# Altium PCB PCB-watch-V2.1.PcbDoc
Units mm, origin at the board's own origin, x right, y up, seen from the top; angles counter-clockwise.
Board outline 26 x 32 mm, 4 copper layers (Top Layer, GND, POWER, Bottom Layer), stack 0.603 mm thick; 97 components, 96 nets, 406 pads, 184 vias.
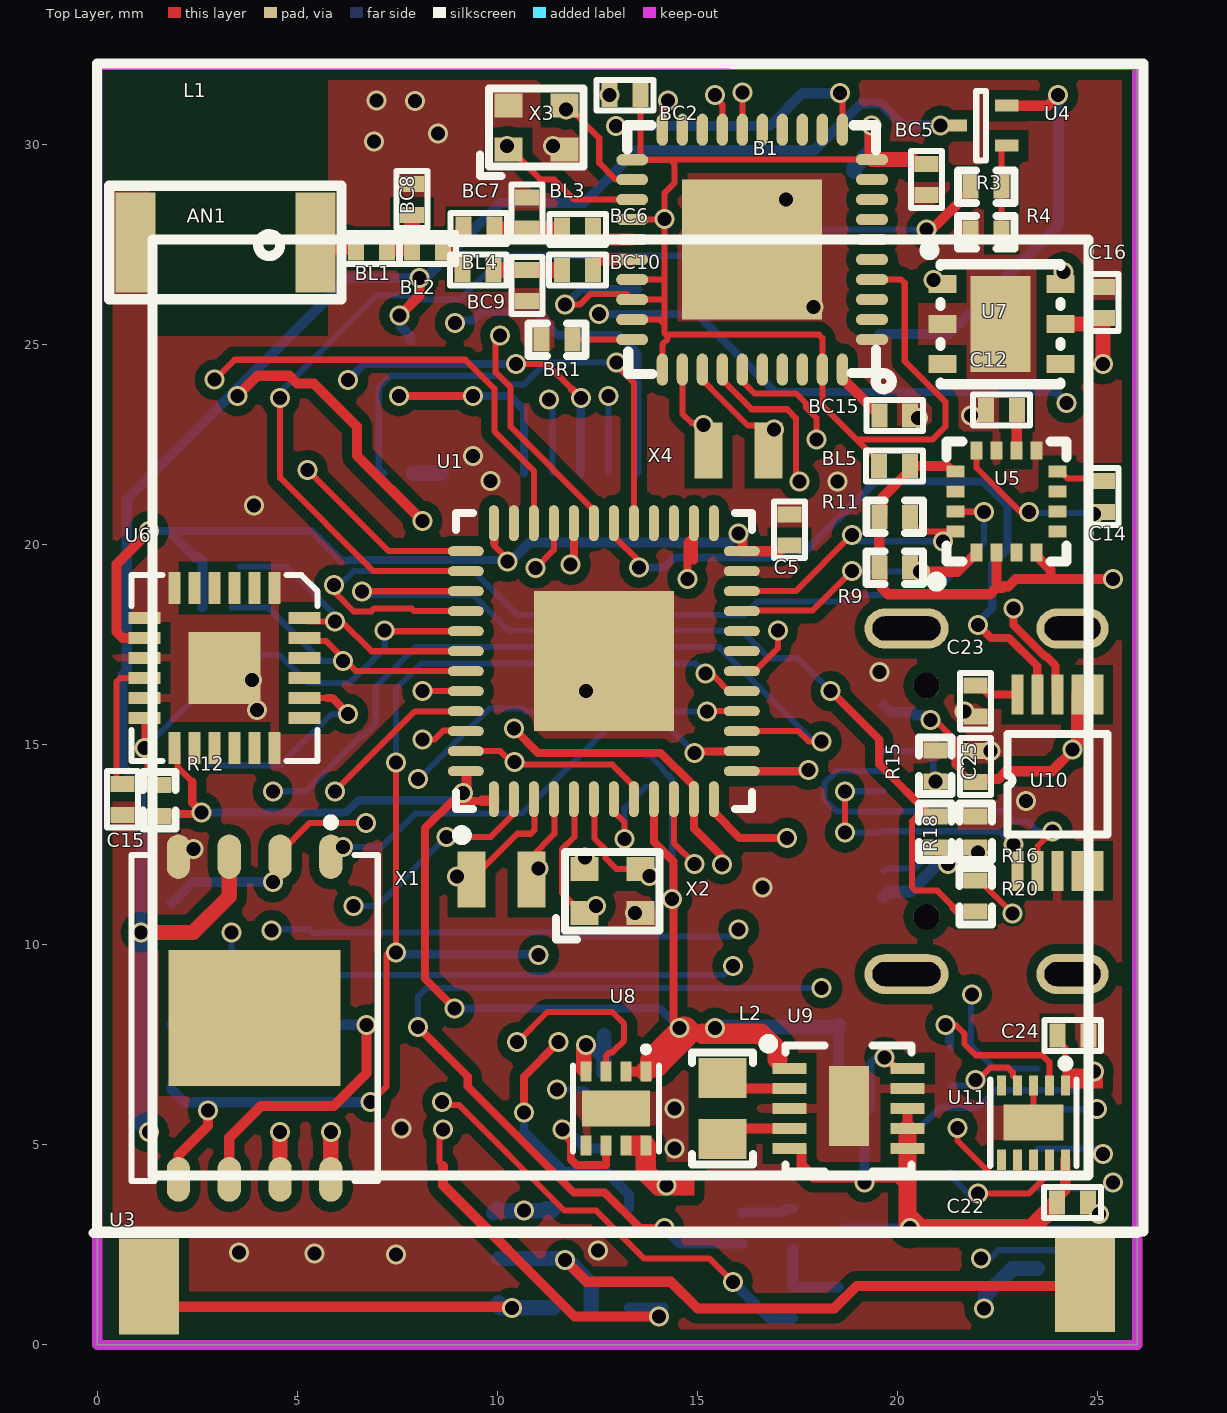
[diagram p0: Top Layer view]
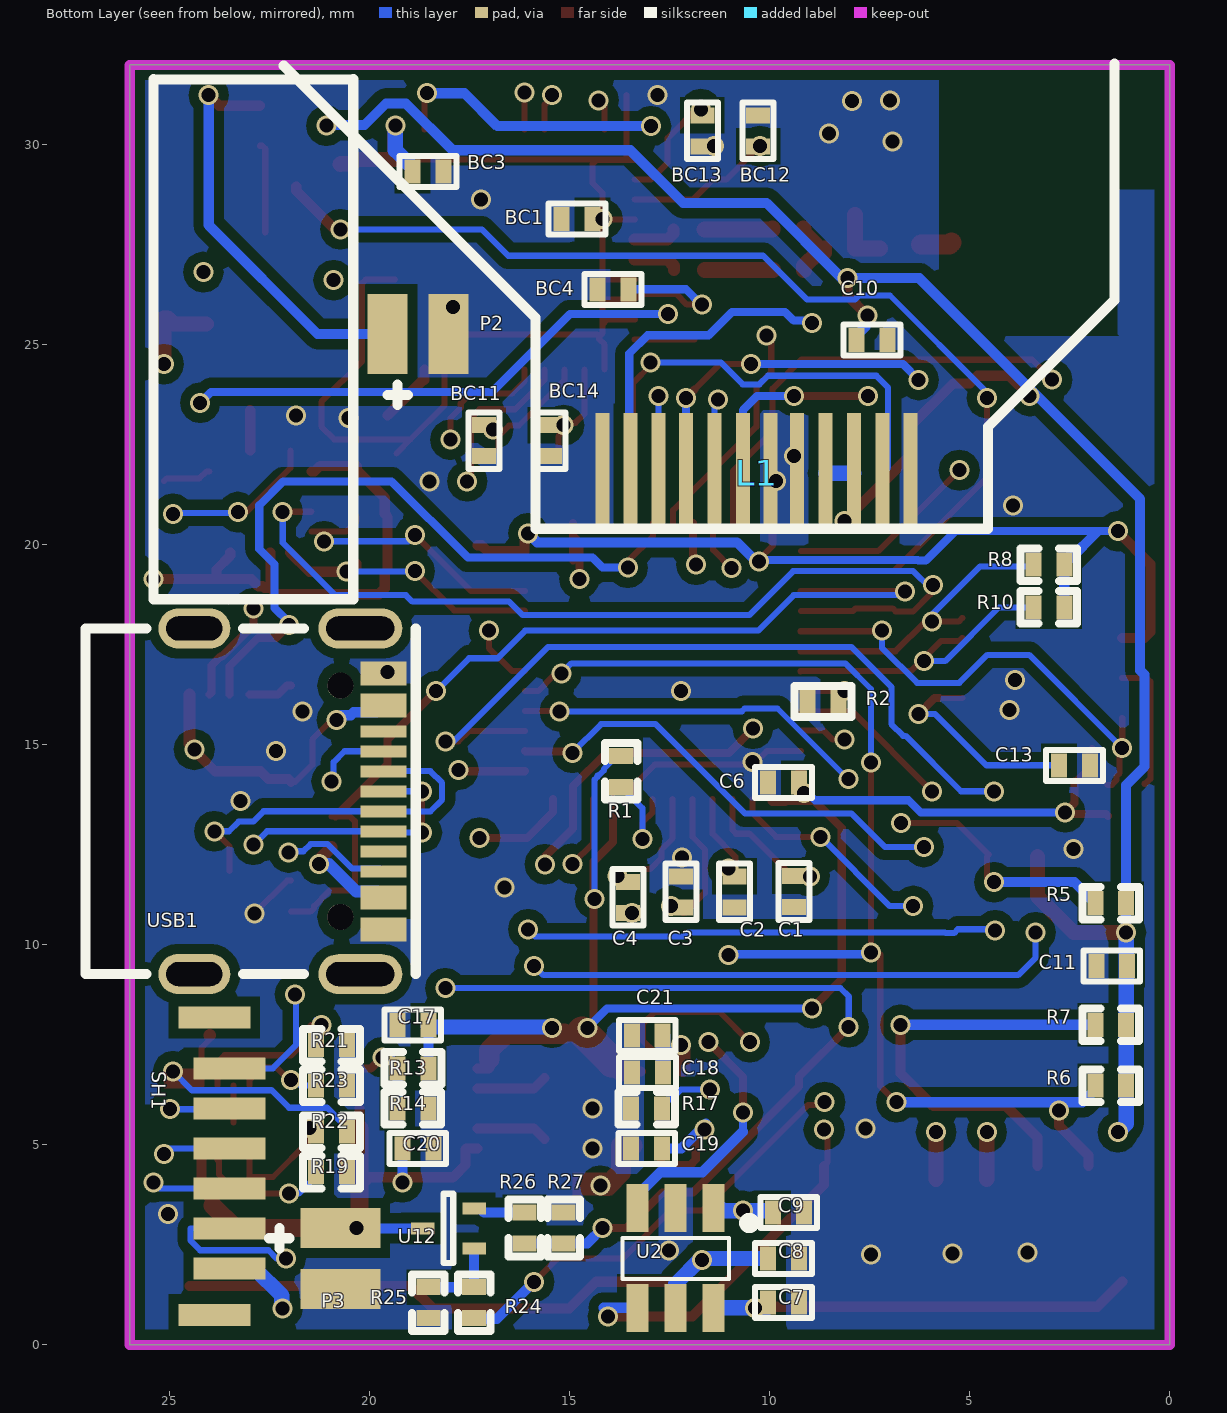
[diagram p1: Bottom Layer view, seen from below]
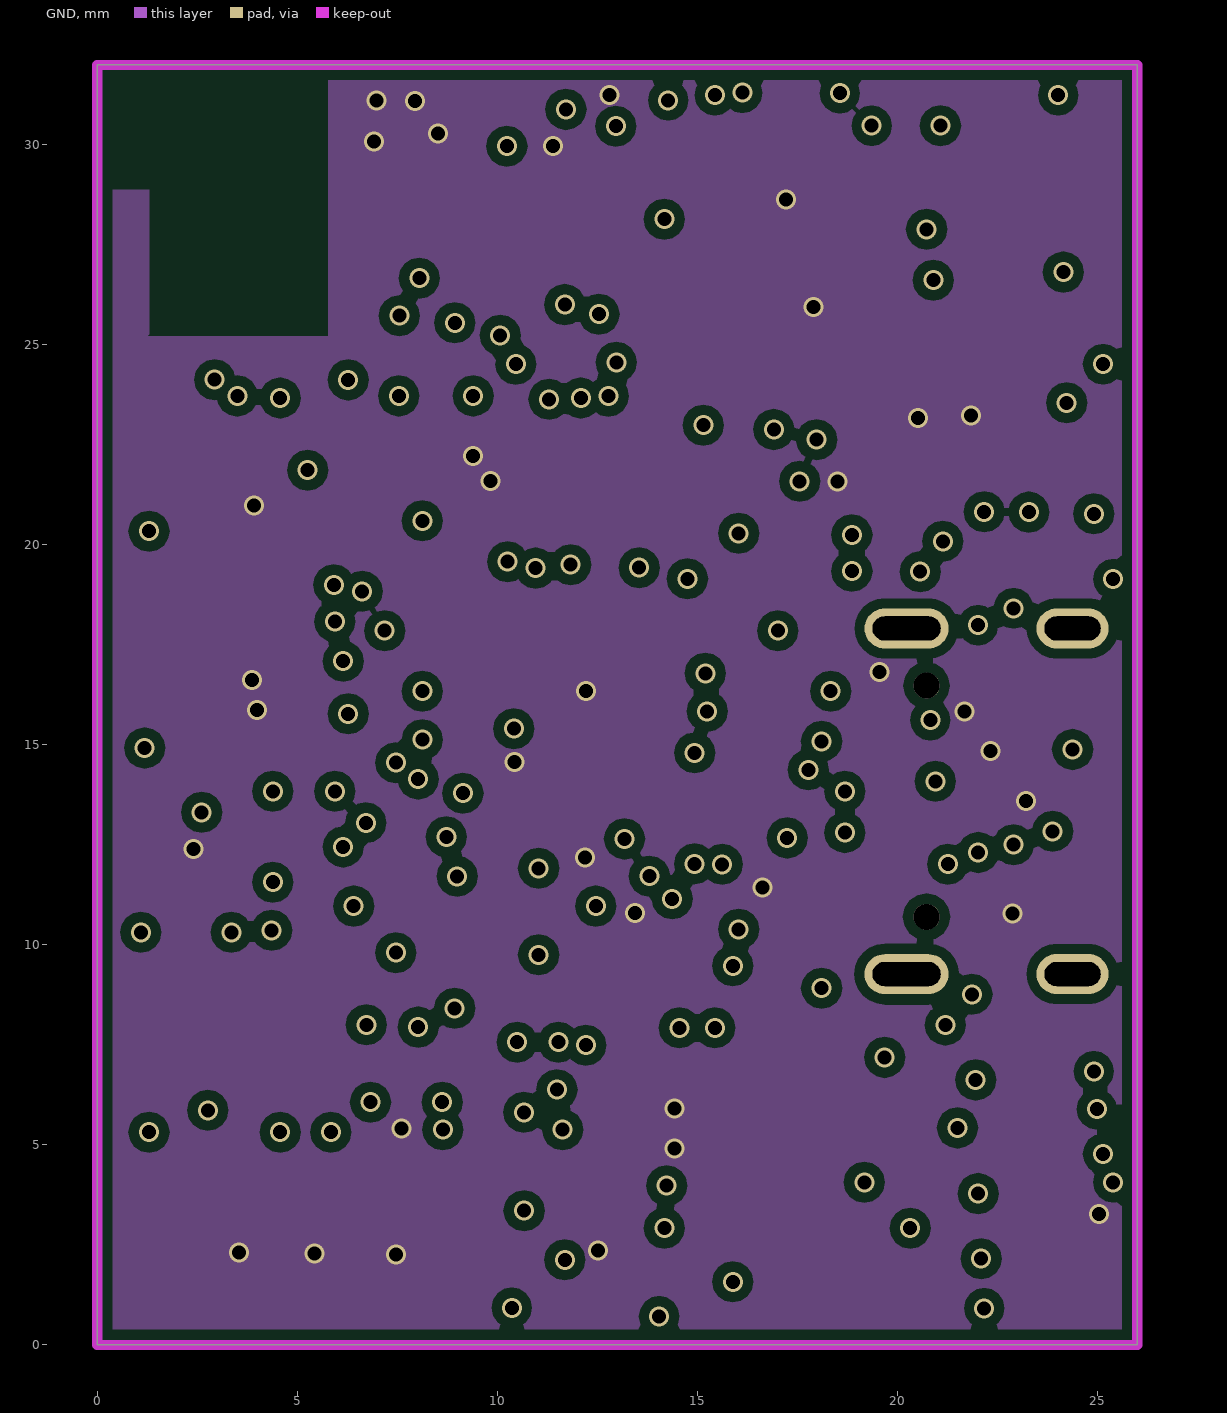
[diagram p2: GND]
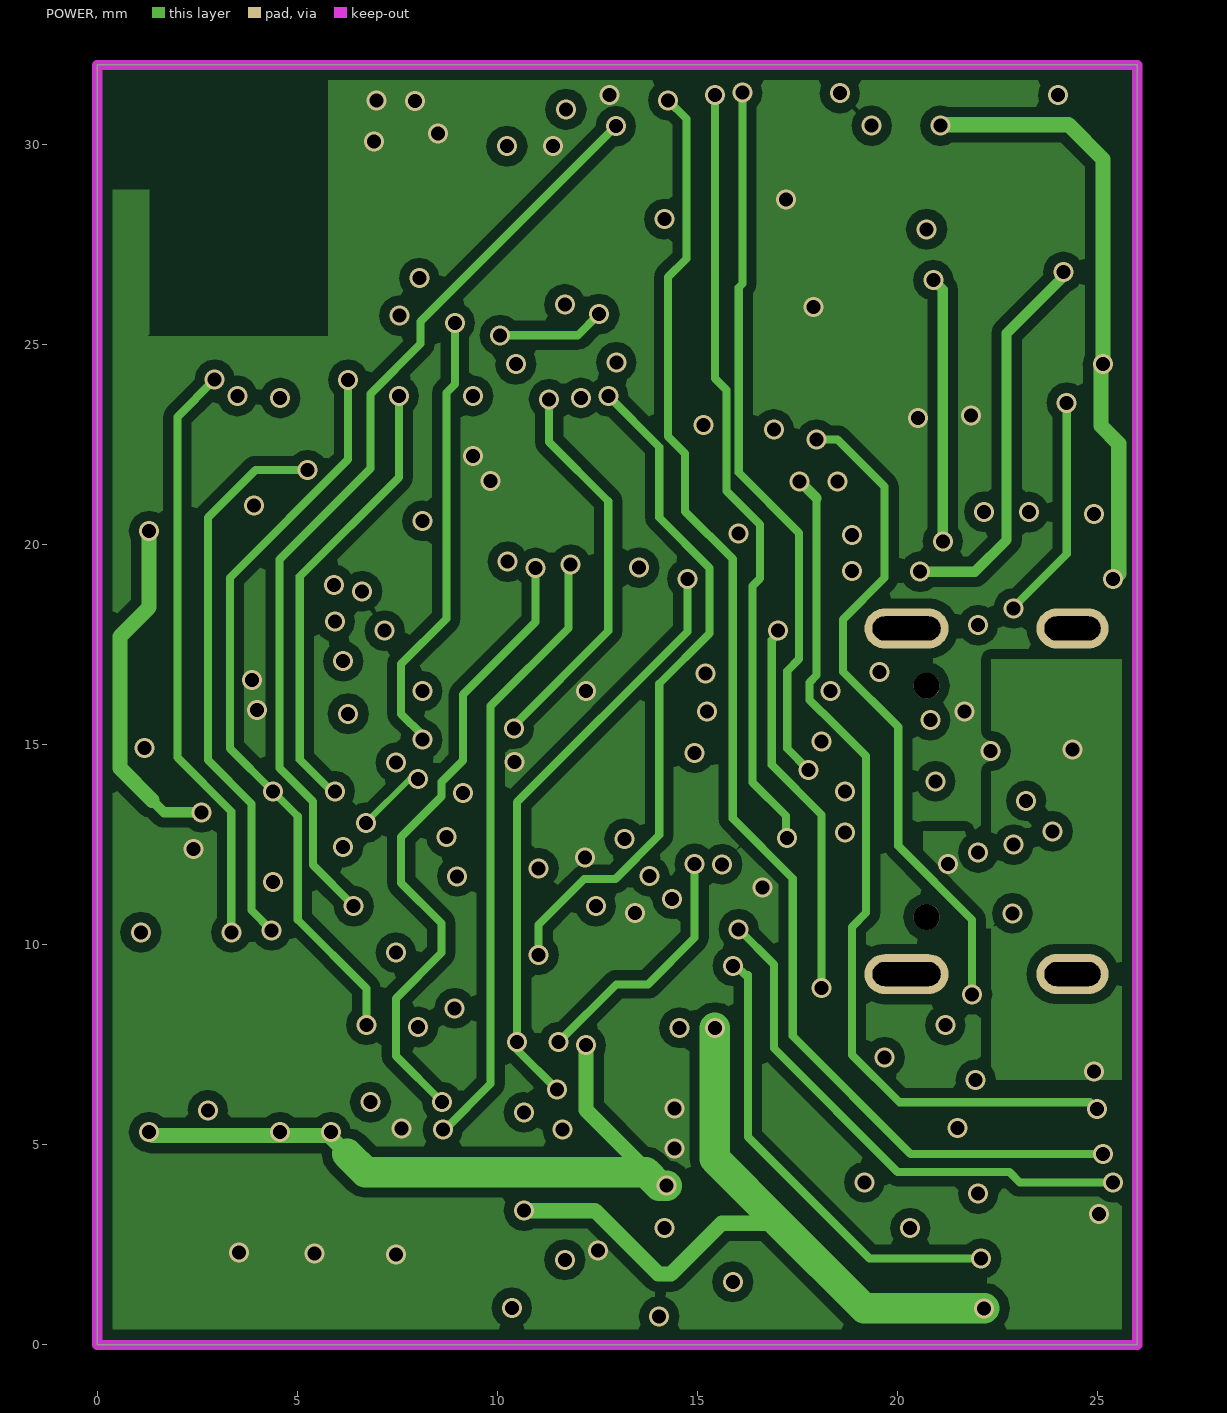
[diagram p3: POWER]
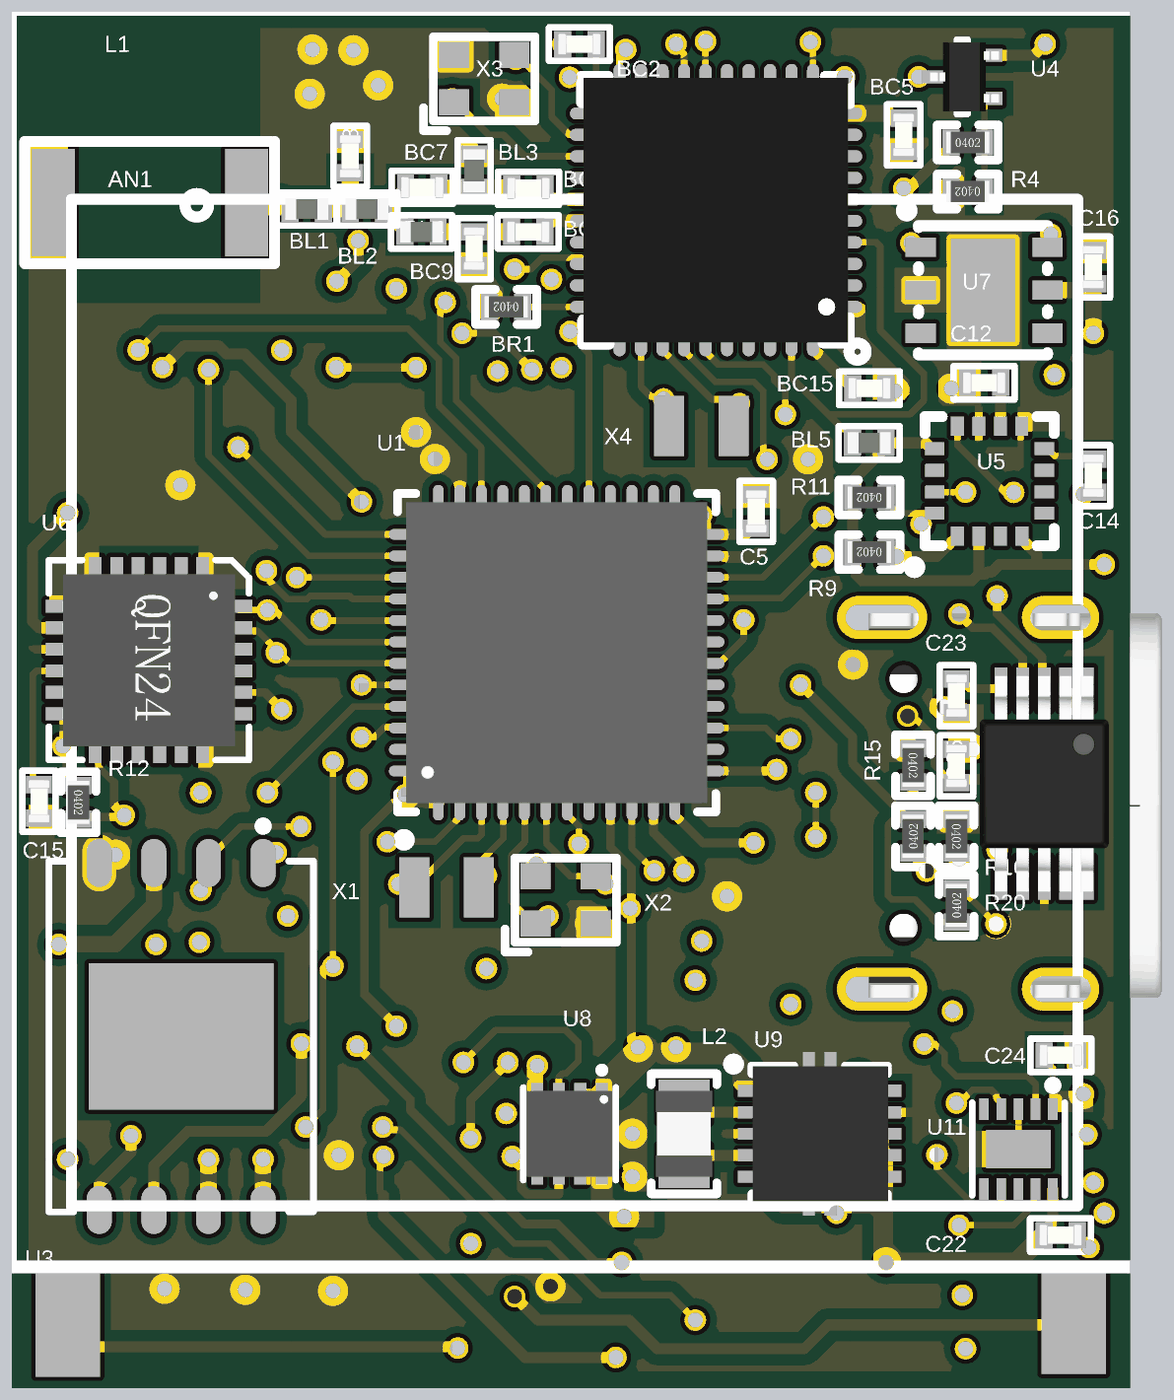
[diagram p4: 3D render of the assembled board from above, using the file's embedded part models]
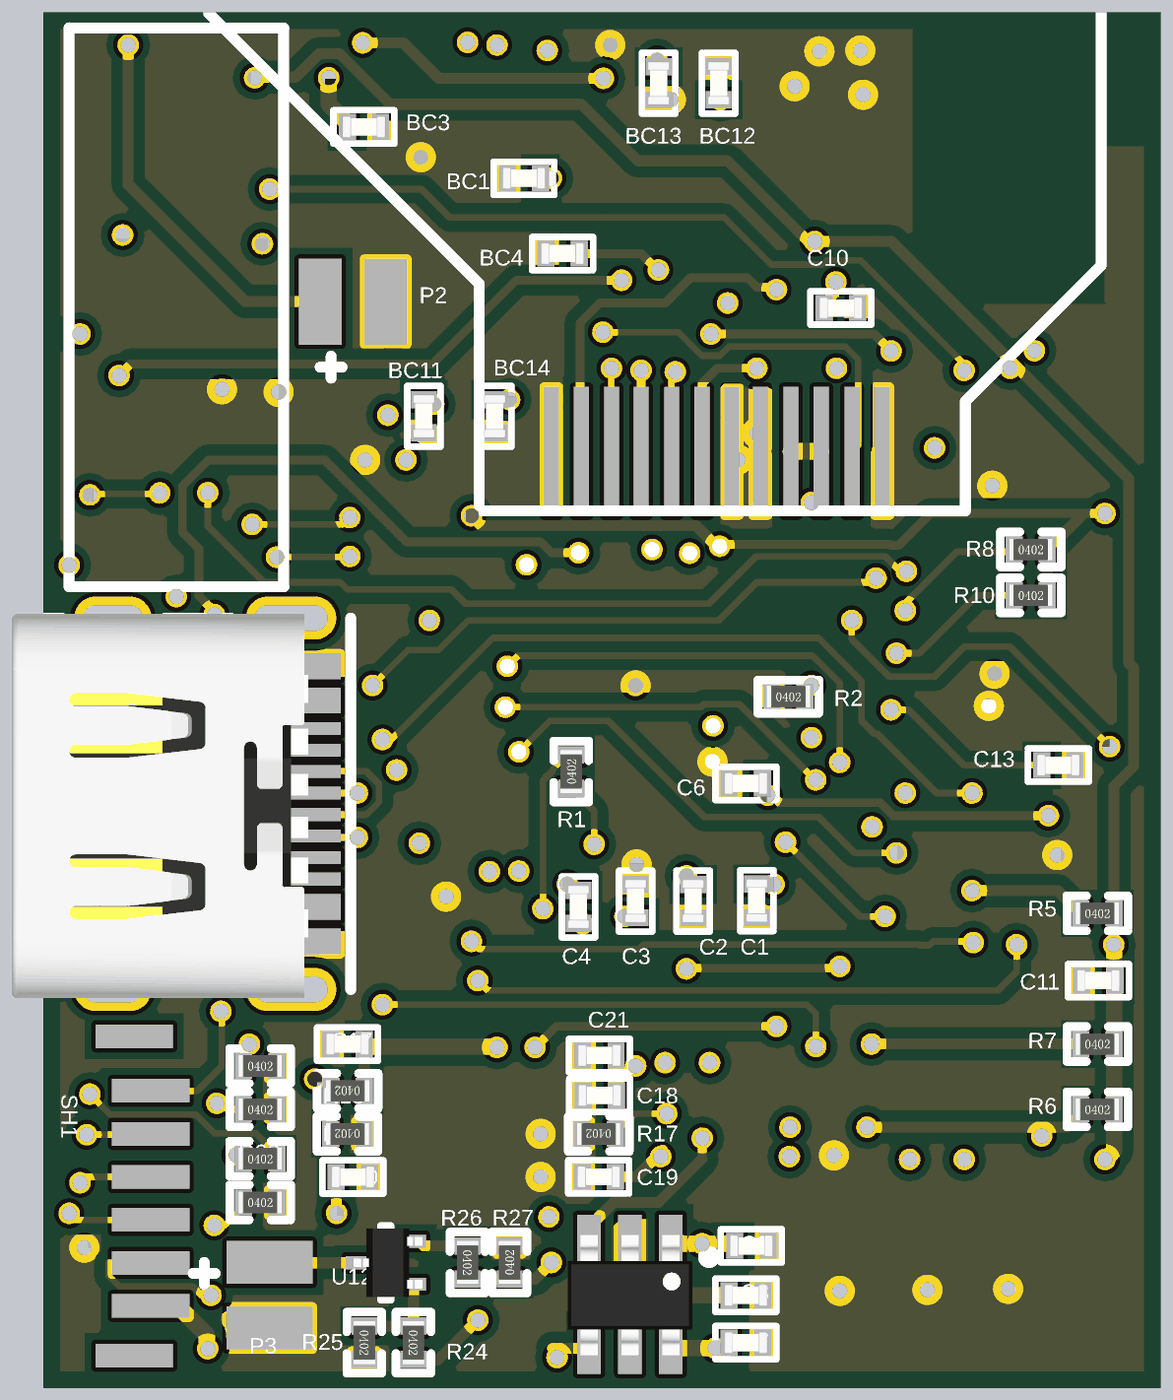
[diagram p5: 3D render of the assembled board from below, using the file's embedded part models]

## Layer stack, top to bottom
Top Solder: solder mask 0.0102, Solder Resist, Dk 3.5
Top Layer: signal copper 0.0356
Dielectric 2: prepreg 0.0711, PP-006, Dk 4.1
GND: signal copper 0.035
Dielectric 1: dielectric 0.32, FR-4, Dk 4.8
POWER: signal copper 0.035
Dielectric 3: prepreg 0.0711, PP-006, Dk 4.1
Bottom Layer: signal copper 0.0356
Bottom Solder: solder mask 0.0102, Solder Resist, Dk 3.5

## Board outline
0,0 0,32 26,32 26,0

## Design rules (kind name [scope] priority, off if disabled: settings)
Clearance [All] p1: gap=0.254 ignorepadtopadclearanceinfootprint=TRUE except(0.102: Arc-Arc Arc-Track Arc-SMDPad Arc-THPad Arc-Via Track-Track Track-SMDPad Track-THPad Track-Via SMDPad-SMDPad SMDPad-THPad SMDPad-Via THPad-THPad THPad-Via Via-Via)
DiffPairsRouting [All] p1: maxlimit=0.254 minlimit=0.15 mostfreqgap=0.254 toplayer_minwidth=0.381 toplayer_maxwidth=0.381 toplayer_prefwidth=0.381 midlayer1_minwidth=0.381 midlayer1_maxwidth=0.381 midlayer1_prefwidth=0.381 midlayer2_minwidth=0.381 midlayer2_maxwidth=0.381 midlayer2_prefwidth=0.381 bottomlayer_minwidth=0.381 bottomlayer_maxwidth=0.381 bottomlayer_prefwidth=0.381 maxuncoupledlength=12.7
HoleToHoleClearance [All] p1: gap=0.15 allowstackedmicrovias=TRUE
MinimumSolderMaskSliver [All] p1: minsoldermaskwidth=0.01
PlaneConnect [All] p1: planeconnectstyle=Relief reliefexpansion=0.508 reliefentries=4 reliefconductorwidth=0.5 reliefairgap=0.254
PolygonConnect [All] p1: connectstyle=Direct reliefconductorwidth=0.4 reliefentries=4 polygonreliefangle="90 Angle" airgapwidth=0.15
RoutingVias [All] p1: holewidth=3 width=3 viastyle="Through Hole" minholewidth=0.25 minwidth=0.35 maxholewidth=3 maxwidth=3
SilkToSilkClearance [All] p1: silktosilkclearance=0
SilkToSolderMaskClearance [IsPad] p1: minsilkscreentomaskgap=0 clearancetoexposedcopper=TRUE
SolderMaskExpansion [All] p1: expansion=0.102
Width [All] p1: maxlimit=1 minlimit=0.076 preferedwidth=0.152
24 further rules are at their usual default settings.

## Classes and differential pairs
component class 04-POWERV2.1: C17 C18 C19 C20 C21 C22 C23 C24 C25 L2 P3 R13 R14 R15 R16 R17 R18 R19 R20 R21 R22 R23 R24 R25 R26 R27 U8 U9 U10 U11 U12 USB1
component class 03-PeripheralPart-V2.1: C7 C8 C9 C10 C11 C12 C13 C14 C15 C16 L1 P2 R3 R4 R5 R6 R7 R8 R9 R10 R11 R12 U2 U3 U4 U5 U6 U7
component class 02-bluetooth-V2.1: AN1 B1 BC1 BC2 BC3 BC4 BC5 BC6 BC7 BC8 BC9 BC10 BC11 BC12 BC13 BC14 BC15 BL1 BL2 BL3 BL4 BL5 BR1 X3 X4
component class 01-MCU-V2.1: C1 C2 C3 C4 C5 C6 R1 R2 SH1 U1 X1 X2

## Components (designator, comment, footprint, x,y, rotation, side; value= is the part's Value field where it differs from the comment)
AN1 "AN9520-245" AN-5120 5.461,27.559 r180 top
B1 "CC2541" QFN40-CC254X 16.373,27.382 r90 top
BC1 "100nF" CC1005-0402 14.816,28.143 r0 bottom
BC2 "100nF" CC1005-0402 13.196,31.242 r180 top
BC3 "220PF" CC1005-0402 18.542,29.337 r180 bottom
BC4 "100nF" CC1005-0402 13.919,26.391 r0 bottom
BC5 "100nF" CC1005-0402 20.734,29.132 r270 top
BC6 "18PF" CC1005-0402 12.012,27.89 r0 top
BC7 "1PF" CC1005-0402 9.542,27.911 r0 top
BC8 "1PF" CC1005-0402 7.868,28.632 r90 top
BC9 "1PF" CC1005-0402 10.748,26.487 r270 top
BC10 "18PF" CC1005-0402 12.006,26.874 r0 top
BC11 "15PF" CC1005-0402 17.145,22.606 r90 bottom
BC12 "27PF" CC1005-0402 10.287,30.353 r270 bottom
BC13 "27PF" CC1005-0402 11.684,30.353 r270 bottom
BC14 "15PF" CC1005-0402 15.494,22.606 r90 bottom
BC15 "100nF" CC1005-0402 19.939,23.241 r180 top
BL1 "1nH" Inductor-0402 6.858,27.409 r0 top
BL2 "1nH" Inductor-0402 8.255,27.409 r0 top
BL3 "2nH" Inductor-0402 10.748,28.298 r270 top
BL4 "2nH" Inductor-0402 9.525,26.874 r0 top
BL5 "2nH" Inductor-0402 19.933,21.971 r0 top
BR1 "56KR" CR1005-0402 11.493,25.132 r180 top
C1 "15pF" CC1005-0402 9.397,11.339 r90 bottom
C2 "15pF" CC1005-0402 10.88,11.328 r90 bottom
C3 "22pF" CC1005-0402 12.217,11.328 r90 bottom
C4 "22pF" CC1005-0402 13.547,11.191 r90 bottom
C5 "100nF" CC1005-0402 17.307,20.378 r270 top
C6 "100nF" CC1005-0402 9.652,14.065 r180 bottom
C7 "1pF" CC1005-0402 9.652,1.056 r180 bottom
C8 "1pF" CC1005-0402 9.652,2.159 r180 bottom
C9 "100NF" CC1005-0402 9.525,3.308 r0 bottom
C10 "100nF" CC1005-0402 7.442,25.124 r180 bottom
C11 "100nF" CC1005-0402 1.448,9.479 r0 bottom
C12 "4.7uF" CC1005-0402 22.606,23.368 r180 top
C13 "2.2uF" CC1005-0402 2.382,14.491 r180 bottom
C14 "0.22uF" CC1005-0402 25.146,21.209 r270 top
C15 "100NF" CC1005-0402 0.631,13.641 r90 top
C16 "100nF" CC1005-0402 25.146,26.057 r90 top
C17 "10uF" CC1005-0402 18.923,8.001 r180 bottom
C18 "100nF" CC1005-0402 13.054,6.808 r0 bottom
C19 "100nF" CC1005-0402 13.076,4.913 r180 bottom
C20 "10uF" CC1005-0402 18.796,4.91 r0 bottom
C21 "10uF" CC1005-0402 13.061,7.735 r180 bottom
C22 "1uF" CC1005-0402 24.384,3.556 r180 top
C23 "10nF" CC1005-0402 21.964,16.094 r270 top
C24 "1uF" CC1005-0402 24.39,7.735 r0 top
C25 "10nF" CC1005-0402 21.964,14.461 r270 top
L1 "TFT LED" LCD-1.3-(2) 6.479,21.793 r180 top locked
L2 "3.3uH" Inductor-0805 15.629,5.91 r90 top
P2 "power" POWER-3.7V 19.939,24.003 r180 bottom
P3 "power" POWER-3.7V 22.004,3.302 r270 bottom
R1 "10KR" CR1005-0402 13.716,14.341 r90 bottom
R2 "10KR" CR1005-0402 8.664,16.084 r180 bottom
R3 "1K" CR1005-0402 22.225,28.956 r0 top
R4 "10K" CR1005-0402 22.225,27.813 r180 top
R5 "47K" CR1005-0402 1.473,11.043 r180 bottom
R6 "47K" CR1005-0402 1.473,6.483 r180 bottom
R7 "47K" CR1005-0402 1.473,8.003 r180 bottom
R8 "10K" CR1005-0402 3.023,19.507 r180 bottom
R9 "10K" CR1005-0402 19.939,19.431 r180 top
R10 "10K" CR1005-0402 3.023,18.44 r180 bottom
R11 "10K" CR1005-0402 19.939,20.701 r180 top
R12 "10K" CR1005-0402 1.549,13.614 r270 top
R13 "1M" CR1005-0402 18.919,6.913 r0 bottom
R14 "178K" CR1005-0402 18.923,5.913 r0 bottom
R15 "1.5K" CR1005-0402 20.955,14.478 r270 top
R16 "1.5K" CR1005-0402 21.964,12.827 r270 top
R17 "10K" CR1005-0402 13.076,5.913 r0 bottom
R18 "10K" CR1005-0402 20.955,12.827 r90 top
R19 "10K" CR1005-0402 20.955,4.318 r180 bottom
R20 "10K" CR1005-0402 21.964,11.219 r90 top
R21 "1K" CR1005-0402 20.955,7.493 r180 bottom
R22 "1K" CR1005-0402 20.955,5.334 r180 bottom
R23 "2K" CR1005-0402 20.955,6.483 r180 bottom
R24 "1K" CR1005-0402 17.389,1.056 r270 bottom
R25 "10K" CR1005-0402 18.532,1.056 r270 bottom
R26 "10K" CR1005-0402 16.129,2.921 r270 bottom
R27 "10K" CR1005-0402 15.152,2.921 r90 bottom
SH1 "SH1.0-7P" SH1.0-6P 23.503,6.913 r270 bottom
U1 "STM32L431CCU6" STM32-UFQFPN48_N 12.667,17.094 r90 top
U2 "BS812A-1" SOT23-6 12.288,2.159 r0 bottom
U3 "W25Q256JVEIQ" WSON-8_L8.0-W6.10-P1.27-TL-EP 3.937,8.172 r270 top
U4 "MMBT3904TT1G" SOT-416 22.098,30.48 r0 top
U5 "HMC5883L" LPCC-16_L3.0-W3.0-P0.50-BL 22.733,21.082 r0 top
U6 "MPU6050" "QFN24 - duplicate" 3.187,16.923 r270 top
U7 "SI7020" DFN-6 22.606,25.521 r270 top
U8 "TPS22965" UDFN-8 12.968,5.91 r270 top
U9 "TPS63000" SON10 17.313,6.872 r0 top
U10 "CH340E" MSOP-10 23.003,11.853 r90 top
U11 "BQ24040" WSON-10_L2.0-W2.0-P0.40-BL-EP 23.403,5.555 r270 top
U12 "MMBT3904TT1G" SOT-416 18.032,2.913 r180 bottom
USB1 "Tpye-c 16P" "TYPE-C 16P" 20.734,10.701 r270 bottom
X1 "32.768Khz" XTAL-2012 10.86,11.638 r180 top
X2 "32Mhz" XTAL-2016 12.177,10.796 r0 top
X3 "32Mhz" XTAL-2016 10.284,29.888 r0 top
X4 "32.768Khz" XTAL-2012 15.284,22.362 r0 top

## Footprints (in the part's own frame and the unit in brackets; to place one, negate y for a bottom-side part, rotate by r counter-clockwise, add the part's x,y. Pads: shape width x height; smd on the part's side, far side on the other; paste and mask are expansions set on the pad)
AN-5120 [mm]
  rect 1x2.5 smd: 1(0,0) 2(4.5,0)
  silkscreen extent -0.64,-1.42 5.16,1.42, body extent -0.32,-1.03 4.77,1.03, height 1.2
CC1005-0402 [mm]
  rect 0.4x0.6 smd: 1(-0.387,0) 2(0.387,0)
  silkscreen extent -0.71,-0.39 0.71,0.39, body extent -0.5,-0.25 0.5,0.25, height 0.3
CR1005-0402 [mm]
  rect 0.4x0.6 smd: 1(-0.387,0) 2(0.387,0)
  silkscreen extent -0.71,-0.41 0.71,0.41, body extent -0.5,-0.25 0.5,0.25, height 0.35
DFN-6 [mm]
  rect 0.45x0.701 smd: 1(-1.001,-1.476) 2(0,-1.476) 3(1.001,-1.476) 4(1.001,1.476) 5(0,1.476) 6(-1.001,1.476)
  rect 2.4x1.5 smd: 7(0,-0.025)
  silkscreen extent -1.95,-1.9 1.5,1.47, body extent -1.52,-1.55 1.5,1.47, height 1
Inductor-0402 [mm]
  rect 0.4x0.6 smd: 1(-0.387,0) 2(0.387,0)
  silkscreen extent -0.71,-0.39 0.71,0.39, body extent -0.5,-0.25 0.5,0.25, height 0.25
Inductor-0805 [mm]
  rect 1x1.2 smd: 1(-0.762,0) 2(0.762,0)
  silkscreen extent -1.4,-0.76 1.4,0.76, body extent -1,-0.65 1,0.66, height 0.73
LCD-1.3-(2) [mm]
  rect 0.35x3 smd far side: 1(0,0) 2(-0.7,0) 3(-1.419,0) 4(-2.128,0) 5(-2.838,0) 6(-3.5,0) 7(-4.193,0) 8(-4.902,0) 9(-5.612,0) 10(-6.3,0) 11(-7,0) 12(-7.7,0)
  silkscreen extent -19.68,-10.24 6.49,18.96, body extent -19.67,-10.24 6.51,18.91, height 1.85
LPCC-16_L3.0-W3.0-P0.50-BL [mm]
  rect 0.3x0.45 smd: 1(-0.749,-1.275) 2(-0.249,-1.275) 3(0.251,-1.275) 4(0.751,-1.275) 9(0.75,1.275) 10(0.25,1.275) 11(-0.25,1.275) 12(-0.749,1.275)
  rect 0.45x0.3 smd: 5(1.275,-0.748) 6(1.275,-0.248) 7(1.275,0.252) 8(1.275,0.752) 13(-1.275,0.752) 14(-1.275,0.252) 15(-1.275,-0.248) 16(-1.275,-0.748)
  silkscreen extent -1.87,-2.12 1.5,1.5, body extent -1.42,-1.48 1.42,1.42, height 0.9
MSOP-10 [mm]
  rect 1x0.3 smd: 1(0,0) 2(0,-0.5) 3(0,-1) 4(0,-1.5) 5(0,-2) 6(4.403,-2) 7(4.403,-1.5) 8(4.403,-1) 9(4.403,-0.5) 10(4.403,0)
  silkscreen extent 0.9,-2.25 3.42,0.25, body extent -0.32,-2.5 4.71,0.5, height 1.05
POWER-3.7V [mm]
  rect 1x2 smd: 1(0.381,1.27) 2(1.905,1.27)
  silkscreen extent 0.38,-0.51 0.89,0
"QFN24 - duplicate" [mm]
  rect 0.8x0.3 smd: 1(-2,1.25) 2(-2,0.75) 3(-2,0.25) 4(-2,-0.25) 5(-2,-0.75) 6(-2,-1.25) 13(2,-1.25) 14(2,-0.75) 15(2,-0.25) 16(2,0.25) 17(2,0.75) 18(2,1.25)
  rect 1.8x1.8 smd: 1(0.005,0)
  rect 0.3x0.8 smd: 7(-1.25,-2) 8(-0.75,-2) 9(-0.25,-2) 10(0.25,-2) 11(0.75,-2) 12(1.25,-2) 19(1.25,2) 20(0.75,2) 21(0.25,2) 22(-0.25,2) 23(-0.75,2) 24(-1.25,2)
  silkscreen extent -2.32,-2.32 2.32,2.32, body extent -2,-2 2.01,2, height 0.9
QFN40-CC254X [mm]
  oval 0.28x0.8 smd: 1(-2.25,-2.998) 2(-1.75,-2.998) 3(-1.25,-2.998) 4(-0.75,-2.998) 5(-0.25,-2.998) 6(0.25,-2.998) 7(0.75,-2.998) 8(1.25,-2.998) 9(1.75,-2.998) 10(2.25,-2.998) 21(2.246,2.996) 22(1.75,2.998) 23(1.25,2.998) 24(0.75,2.998) 25(0.25,2.998) 26(-0.25,2.998) 27(-0.75,2.998) 28(-1.25,2.998) 29(-1.75,2.998) 30(-2.25,2.998)
  oval 0.8x0.28 smd: 11(2.998,-2.256) 12(2.998,-1.756) 13(2.998,-1.256) 14(2.998,-0.756) 15(2.998,-0.256) 16(2.998,0.244) 17(2.998,0.744) 18(2.998,1.244) 19(2.998,1.744) 20(2.998,2.244) 31(-2.998,2.244) 32(-2.998,1.744) 33(-2.998,1.244) 34(-2.998,0.744) 35(-2.998,0.244) 36(-2.998,-0.256) 37(-2.998,-0.756) 38(-2.998,-1.256) 39(-2.998,-1.756) 40(-2.998,-2.256)
  rect 3.5x3.5 smd: 41(0,0)
  silkscreen extent -3.49,-3.49 3.11,3.12, body extent -3.08,-3.07 3.07,3.08, height 1.08
SH1.0-6P [mm]
  rect 0.55x1.8 smd: 0(-1.27,-0.381) 0(6.159,-0.381) 1(0,0) 2(1,0) 3(2,0) 4(3,0) 5(4,0) 6(5,0)
  body extent -1.52,-3.17 6.48,0, height 3
SON10 [mm]
  rect 0.85x0.28 smd: 1(-0.005,0.038) 2(-0.005,-0.461) 3(-0.005,-0.962) 4(-0.005,-1.462) 5(-0.005,-1.962) 6(2.945,-1.962) 7(2.945,-1.462) 8(2.945,-0.962) 9(2.945,-0.461) 10(2.945,0.038)
  rect 1x2 smd: 9(1.483,-0.903)
  silkscreen extent -0.65,-2.54 3.04,0.78, body extent -0.09,-2.54 3.06,0.61, height 1
SOT23-6 [mm]
  rect 0.55x1.2 smd: 1(-0.889,-1.27) 2(0.061,-1.27) 3(1.011,-1.27) 4(1.011,1.23) 5(0.061,1.23) 6(-0.889,1.23)
  silkscreen extent -1.9,-1.02 1.4,0.51, body extent -1.39,-1.4 1.51,1.4, height 1.45
SOT-416 [mm]
  rect 0.585x0.301 smd: 1(0.642,-0.5) 2(0.642,0.5) 3(-0.642,0)
  silkscreen extent -0.12,-0.87 0.12,0.87, body extent -0.75,-0.8 0.85,0.8, height 0.78
STM32-UFQFPN48_N [mm] "QFN, 48-Leads, Body 7.1x7.1mm, Pitch 0.5mm, Thermal Pad 5.6x5.6mm, IPC Medium Density"
  oval 0.9x0.25 smd: 1(-3.45,2.75) 2(-3.45,2.25) 3(-3.45,1.75) 4(-3.45,1.25) 5(-3.45,0.75) 6(-3.45,0.25) 7(-3.45,-0.25) 8(-3.45,-0.75) 9(-3.45,-1.25) 10(-3.45,-1.75) 11(-3.45,-2.25) 12(-3.45,-2.75) 25(3.45,-2.75) 26(3.45,-2.25) 27(3.45,-1.75) 28(3.45,-1.25) 29(3.45,-0.75) 30(3.45,-0.25) 31(3.45,0.25) 32(3.45,0.75) 33(3.45,1.25) 34(3.45,1.75) 35(3.45,2.25) 36(3.45,2.75)
  oval 0.25x0.9 smd: 13(-2.75,-3.45) 14(-2.25,-3.45) 15(-1.75,-3.45) 16(-1.25,-3.45) 17(-0.75,-3.45) 18(-0.25,-3.45) 19(0.25,-3.45) 20(0.75,-3.45) 21(1.25,-3.45) 22(1.75,-3.45) 23(2.25,-3.45) 24(2.75,-3.45) 37(2.75,3.45) 38(2.25,3.45) 39(1.75,3.45) 40(1.25,3.45) 41(0.75,3.45) 42(0.25,3.45) 43(-0.25,3.45) 44(-0.75,3.45) 45(-1.25,3.45) 46(-1.75,3.45) 47(-2.25,3.45) 48(-2.75,3.45)
  rect 3.5x3.5 smd: 49(0,0)
  silkscreen extent -4.47,-3.7 3.7,3.7, body extent -3.5,-3.5 3.5,3.5, height 0.55
"TYPE-C 16P" [mm]
  oval 1x2.099 hole 0.6 slot 1.7 at 90 deg: 1(-7.21,0.5) 2(1.43,0.5)
  oval 1x1.799 hole 0.6 slot 1.4 at 90 deg: 3(-7.21,-3.65) 4(1.43,-3.65)
  rect 0.6x1.15 smd: A1B12(-6.09,1.075) A4B9(-5.29,1.075) B1A12(0.31,1.075) B4A9(-0.49,1.075)
  rect 0.3x1.15 smd: A5(-4.14,1.075) A6(-3.14,1.075) A7(-2.64,1.075) A8(-1.64,1.075) B5(-1.14,1.075) B6(-2.14,1.075) B7(-3.64,1.075) B8(-4.64,1.075)
  round 0.65 hole 0.65 unplated: ""(-5.78,0) ""(0,0)
  silkscreen extent -7.21,-6.37 1.43,1.89, body extent -7.31,-6 1.63,0.9, height 3.18
UDFN-8 [mm]
  rect 0.505x0.28 smd: 1(-0.928,0.75) 2(-0.928,0.25) 3(-0.928,-0.25) 4(-0.928,-0.75) 5(0.928,-0.75) 6(0.928,-0.25) 7(0.928,0.25) 8(0.928,0.75)
  rect 0.9x1.7 smd: 9(0,0)
  silkscreen extent -1.55,-1.08 1.08,1.08, body extent -1,-1 1,1, height 0.59
WSON-8_L8.0-W6.10-P1.27-TL-EP [mm]
  oval 1.115x0.581 smd: 1(-4.033,1.905) 2(-4.033,0.635) 3(-4.033,-0.635) 4(-4.033,-1.905) 5(4.033,-1.905) 6(4.033,-0.635) 7(4.033,0.635) 8(4.033,1.905)
  rect 3.4x4.3 smd: 9(0,0)
  silkscreen extent -4.99,-3.08 4.08,3.08, body extent -4.06,-3.1 4.06,3.1, height 1.2
WSON-10_L2.0-W2.0-P0.40-BL-EP [mm]
  rect 0.505x0.224 smd: 1(-0.928,0.8) 2(-0.928,0.4) 3(-0.928,0) 4(-0.928,-0.4) 5(-0.928,-0.8) 6(0.928,-0.8) 7(0.928,-0.4) 8(0.928,0) 9(0.928,0.4) 10(0.928,0.8)
  rect 0.9x1.5 smd: 11(0,0)
  silkscreen extent -1.58,-1.08 1.08,1.08, body extent -1.1,-1.1 0.97,1.1, height 0.81
XTAL-2012 [mm]
  rect 0.7x1.4 smd: 1(0,0) 2(1.5,0)
  body extent -0.21,-0.69 1.76,0.69, height 0.55
XTAL-2016 [mm] "缺的角在右边"
  rect 0.7x0.6 smd: 1(0,0) 2(1.4,0) 3(1.4,1.1) 4(0,1.1)
  silkscreen extent -0.71,-0.66 1.88,1.52, body extent -0.27,-0.24 1.69,1.4, height 0.55

## Part data
AN1: "2.4G全向天线 蓝牙天线 陶瓷贴片 WIFI内置"
B1: "低功耗蓝牙芯片"
BC1 BC2 BC3 BC4 BC5 BC6 BC7 BC8 BC9 BC10 BC11 BC12 BC13 BC14 BC15: library part "Cap Chip 0402", "0402封装电容", Published=8-Jun-2000, Publisher="Altium Limited", Revision="July-2002: Re-released for DXP Platform."
BL1 BL2 BL3 BL4 BL5: library part Inductor-0402, "0402封装的电感"
BR1 R1 R2 R3 R4 R5 R6 R7 R8 R9 R10 R11 R12 R13 R14 R15 R16 R17 R18 R19 R20 R21 R22 R23 R24 R25 R26 R27: library part "Chip resistor", "贴片电阻"
C1 C2 C3 C4 C5 C6 C7 C8 C9 C10 C11 C12 C13 C14 C15 C16 C17 C18 C19 C20 C21 C22 C23 C24 C25: library part "Chip capacitor", "贴片电容"
L1: library part LCD-IPSscreen-1.3, "1.3寸显示屏幕"
L2: library part "Chip inductor", "贴片电感"
SH1: "间距为1mm的端子"
U1: "stm32低功耗单片机 主频80MHz"
U2: "触摸按键 两路 SOP23-6封装极简电路"
U3: "FLASH"
U4 U12: "NPN 电流 - 集电极（Ic）（最大值）：200mA 电压 - 集射极击穿（最大值）：40V SOT-23-3"
U5: "三轴罗盘"
U6: "陀螺仪"
U7: "温湿度传感器芯片"
U8: "DFN-8 功率开关芯片 TPS22965DSGR"
U9: "宽电压电源转换芯片输出3.3V输入1V至6V"
U10: "usd转串口芯片 MSOP10封装"
U11: library part BQ24041, "1A 具有自动启动功能的单输入，单节锂离子和锂聚合物电池充电 / 器"
USB1: "16P 封装的TYPE -c接口 4固定插脚 双向"
X1 X4: library part "XTAL 2012", "2012封装的时钟晶振"
X2 X3: library part "XTAL 2016", "2016封装的晶振"

## Free pads (board coordinates)
  rect 1.5x2.4 smd: 2(1.3,1.466) 2(24.693,1.528)

## Via types
v1: diameter 0.5, hole 0.35, Top Layer to Bottom Layer, 184 vias

## Nets (pads, with @x,y where several pads share a name; then routed paths per layer and width w, separated by ;. In a path a pad name is that pad's centre, name@x,y a point inside that pad or via, vN(x,y) a via of type N, cw(c..) or ccw(c..) an arc to the next point about the centre after c; other vN are vias at no path point)
3.3V: BL5.2 C10.1 C11.1 C16.1 C18.1 C21.2 L1.3 L1.4 R5.2 R6.2 R7.2 R9.2 R11.2 U3.3 U3.7 U3.8 U4.3 U5.2 U5.4 U5.13 U7.5 U8.4 U8.7 U8.8 | length 106.4
  Top Layer w0.254: v1(3.502,23.724) 4.007,24.229 4.802,24.229 4.994,24.037 5.414,24.037 6.497,22.954 6.497,22.232 v1(8.128,20.601) ; v1(7.556,25.73) 8.052,26.226 v1(8.052,26.67) ; R9.2 R11.2 19.625,20.774 19.625,21.176 20.32,21.871 BL5.2 21.246,21.971 21.383,21.834 U5.13 ; R9.2@19.625,19.258 19.625,18.914 19.774,18.765 22.321,18.765 22.479,18.923 ; U5.2 22.482,19.804 22.482,18.926 22.479,18.923 ; U5.4 23.484,19.732 23.829,19.387 23.829,19.145 ; v1(25.4,19.145) 23.829,19.145 ; 22.479,18.923 22.632,18.923 22.678,18.968 22.782,18.968 22.959,19.145 23.829,19.145
  Top Layer w0.381: v1(1.092,10.312) 2.399,10.312 3.302,11.215 U3.3 ; U3.7 v1(4.572,5.318) ; U3.8 v1(5.842,5.318) ; U8.4@12.167,6.888 v1@12.167,7.375 ; U7.5 24.897,25.521 25.046,25.67 C16.1 v1(25.146,24.52)
  Top Layer w0.508: 13.429,4.983 U8.8 13.718,4.315 14.05,3.982 v1(14.236,3.982)
  POWER w0.381: v1(1.295,5.318) 1.381,5.232 5.797,5.232 6.254,4.775 ; v1(12.217,7.493) 12.217,5.875 13.77,4.322 ; v1@21.06,30.505 24.282,30.505 25.146,29.642 v1(25.146,24.52) ; v1@25.095,24.46 25.095,22.979 25.537,22.537 25.537,19.282 v1(25.4,19.145)
  POWER w0.762: 6.254,4.775 6.708,4.322 13.711,4.322 14.05,3.982 v1(14.236,3.982)
  Bottom Layer w0.254: v1(1.092,10.312) 1.092,13.995 0.631,14.457 0.631,16.752 0.739,16.861 0.739,21.147 6.262,26.67 v1(8.052,26.67) 8.199,26.67 10.076,28.547 12.164,28.547 13.483,29.866 17.927,29.866 19.097,31.036 19.591,31.036 20.131,30.496 21.066,30.496 v1(21.082,30.48) ; v1(7.556,25.73) 7.603,25.683 7.603,25.45 7.829,25.224 C10.1 ; v1(12.217,7.493) 12.284,7.493 12.505,7.272 12.67,7.272
  Bottom Layer w0.381: v1@1.086,10.312 R7.2 R6.2 1.086,5.527 v1(1.295,5.318) ; L1.3 L1.4 ; C18.1 12.67,6.812 12.67,7.272 C21.2@12.67,7.731
5V: C24.1 C25.2 R18.1 R22.2 U10.7 U11.1 USB1.A4B9 USB1.B4A9 | length 16.5
  Top Layer w0.152: v1(20.828,15.621) 20.895,15.554 21.017,15.554 21.433,15.139 21.433,14.505 21.864,14.074 C25.2 ; C24.1 24.003,7.635 24.203,7.435 U11.1
  Top Layer w0.254: C25.2 22.037,14.147 22.535,14.147 22.729,14.341 23.866,14.341 24.384,14.859 v1@24.384,14.912
  Top Layer w0.305: R18.1 21.267,12.128 v1(21.267,12.017) ; C24.1@23.997,7.741 C24.1 ; v1@24.384,14.912 24.503,15.031 U10.7
  Bottom Layer w0.152: R22.2 20.568,5.434 21.063,5.929 22.014,5.929 22.45,6.366 24.445,6.366 v1(24.917,6.838)
  Bottom Layer w0.254: USB1.A4B9 19.832,15.818 20.399,15.818 20.475,15.742 20.707,15.742 v1(20.828,15.621)
  Bottom Layer w0.305: USB1.B4A9 19.807,11.339 20.337,11.339 21.015,12.017 v1(21.267,12.017)
  other v1: 24.384,14.885
ADC1_IN15: R26.2 R27.1 U1.18 | length 32.5
  Top Layer w0.152: U1.18 16.442,16.844 17.018,17.421 v1(17.018,17.856)
  Top Layer w0.203: v1(8.025,7.948) 9.264,6.708 9.264,6.464 11.914,3.815 12.684,3.815 13.578,2.921 v1(14.179,2.921)
  POWER w0.203: v1(17.018,17.856) 17.018,17.776 16.866,17.623 16.866,14.497 18.109,13.253 v1(18.109,8.92)
  Bottom Layer w0.152: v1(8.025,7.948) 8.025,8.714 8.23,8.92 v1(18.109,8.92)
  Bottom Layer w0.254: v1(14.179,2.921) 14.557,2.542 14.557,2.534 R27.1 R26.2
BOOT0: R2.2 U1.44 | length 1.1
  Top Layer w0.152: v1(8.128,16.344) U1.44
DEBUG_CLOCK: B1.34 SH1.2 | length 27.5
  Top Layer w0.152: B1.34 15.629,24.124 16.362,23.391 17.251,23.391 17.47,23.172 v1@17.47,21.675
  POWER w0.203: 17.986,21.167 17.986,16.742 17.808,16.564 17.808,16.124 18.119,15.814 18.133,15.814 19.223,14.724 19.223,10.804 18.869,10.45 18.869,7.252 20.054,6.067 24.819,6.067 v1(24.994,5.893)
  POWER w0.254: v1(17.563,21.59) 17.986,21.167
  Bottom Layer w0.152: SH1.2 23.523,5.893 v1(24.994,5.893)
DEBUG_DATA: B1.35 SH1.1 | length 23
  Top Layer w0.152: B1.35 16.129,24.09 16.43,23.789 17.471,23.789 17.724,23.536 17.724,23.432 17.983,23.172 v1(17.983,22.631)
  POWER w0.203: v1(17.983,22.631) 18.511,22.631 19.685,21.457 19.685,19.178 18.644,18.137 18.644,16.829 20.028,15.444 20.028,12.47 21.869,10.628 v1(21.869,8.763)
  Bottom Layer w0.152: v1(21.869,8.763) 21.844,8.738 21.844,7.493 22.424,6.913 SH1.1
DM_USB-: U10.2 USB1.A7 USB1.B7 | length 9.2
  Top Layer w0.152: U10.2 23.504,11.854 23.504,12.461 v1(23.884,12.841)
  Bottom Layer w0.152: USB1.B7 19.654,14.346 18.483,14.346 18.188,14.05 18.188,13.632 18.483,13.336 19.654,13.336 USB1.A7 22.651,13.341 22.908,13.084 23.275,13.084 23.517,12.841 v1(23.884,12.841)
DOUP: B1.40 BC15.2 | length 1.5
  Top Layer w0.254: B1.40 18.629,24.131 18.641,24.119 18.674,24.119 BC15.2
DP_USB+: U10.1 USB1.A6 USB1.B6 | length 6.4
  Top Layer w0.152: v1(18.693,12.81) v1(18.693,13.841)
  Bottom Layer w0.152: v1(18.693,12.81) 19.628,12.81 USB1.B6 22.565,12.841 22.899,12.507 v1(22.908,12.507) ; v1(18.693,13.841) USB1.A6
GET_VBAT: R24.2 U1.33 | length 28.4
  Top Layer w0.152: v1(8.625,6.067) 8.692,6.001 9.038,6.001 11.683,3.357 12.481,3.357 13.679,2.159 15.311,2.159 v1(15.891,1.579) ; v1(10.961,19.422) 11.417,19.877 U1.33
  POWER w0.203: v1(8.625,6.067) 7.468,7.225 7.468,8.664 8.607,9.804 8.607,10.542 7.597,11.552 7.597,12.699 8.607,13.709 8.607,14.074 9.144,14.61 9.144,16.259 10.961,18.076 v1(10.961,19.422)
  Bottom Layer w0.254: v1(15.891,1.579) 16.818,0.652 17.372,0.652 R24.2
GND: AN1.2 B1.1 B1.41 BC1.2 BC2.2 BC3.2 BC4.2 BC5.2 BC8.2 BC9.2 BC11.1 BC12.1 BC13.2 BC14.1 BC15.1 BL3.1 BR1.2 C1.1 C2.1 C3.2 C4.1 C5.1 C6.1 C7.2 C8.2 C9.1 C10.2 C11.2 C12.2 C13.2 C15.1 C16.2 C17.1 C18.2 C19.1 C20.1 C21.1 C22.1 C23.2 C24.2 C25.1 L1.1 L1.5 L1.6 L1.12 P2.2 P3.2 R2.1 R4.2 R14.1 R15.1 R16.1 R17.2 R19.2 R20.2 R21.2 R23.2 R25.2 R27.2 U1.8 U1.23 U1.35 U1.47 U1.49 U2.2 U3.4 U5.9 U5.11 U6.1 U6.6 U6.7 U6.9 U6.11 U6.18 U7.2 U7.7 U8.5 U8.9 U9.3 U9.9 U10.3 U11.3 U11.11 USB1.A1B12 USB1.B1A12 X2.2 X2.4 X3.2 X3.4 | length 7.1
  Top Layer w0.152: U1.47 10.077,14.844 10.347,14.574 v1(10.429,14.574) 10.496,14.507 12.879,14.507 13.417,13.969 U1.8 ; R20.2 22.064,11.606 v1(22.882,10.787) ; U11.11 U11.3
  other v1: 7.468,2.259 5.427,2.284 3.55,2.308 12.523,2.362 25.046,3.267 14.429,4.91 7.603,5.412 14.429,5.913 13.442,10.799 16.629,11.431 12.196,12.18 2.405,12.398 23.224,13.602 22.339,14.848 21.683,15.831 3.999,15.869 12.219,16.344 3.866,16.619 19.557,16.819 3.917,20.99 9.837,21.596 18.511,21.59 9.398,22.219 20.526,23.172 21.844,23.235 17.912,25.951 17.217,28.632 11.397,29.973 6.925,30.086 8.518,30.283 7.942,31.096 6.989,31.115 12.809,31.242
HMC_DRDY: U1.40 U5.15 | length 22.7
  Top Layer w0.152: v1@5.985,18.933 5.985,18.765 6.414,18.336 6.852,18.336 6.928,18.412 7.853,18.412 7.921,18.344 U1.40 ; U5.15 21.47,20.822 21.476,20.828 v1@22.213,20.828
  Bottom Layer w0.152: v1@5.993,18.925 6.414,19.346 9.41,19.346 10.511,18.245 16.177,18.245 16.514,18.581 18.933,18.581 19.097,18.745 20.866,18.745 22.174,20.053 v1(22.174,20.828)
  other v1: 5.918,18.999
IIC1_SCL: R8.1 U1.42 U6.24 | length 7.4
  Top Layer w0.152: U6.24 5.275,18.085 v1(5.944,18.085) 6.116,18.085 6.86,17.341 U1.42@9.229,17.341
  Bottom Layer w0.152: R8.1@3.556,19.456 4.744,19.456 5.944,18.257 v1(5.944,18.085)
IIC1_SDA: R10.1 U1.43 U6.23 | length 7.7
  Top Layer w0.152: U6.23 5.261,17.599 5.715,17.599 6.465,16.849 9.221,16.849 U1.43@9.229,16.841
  Bottom Layer w0.152: R10.1@3.353,18.44 4.267,18.44 5.613,17.094 v1(6.147,17.094)
IIC2_SCL: R9.1 U1.21 U5.1 U7.6 | length 16.7
  Top Layer w0.152: U1.21 16.134,18.361 17.886,18.361 v1(18.869,19.344)
  Top Layer w0.254: R9.1 20.326,19.531 v1@20.551,19.306 ; v1(20.574,19.329) 21.507,19.329 U5.1
  POWER w0.254: v1(20.574,19.329) 21.942,19.329 22.737,20.125 22.737,25.29 24.155,26.708 v1(24.155,26.822)
  Bottom Layer w0.152: v1(18.869,19.344) 18.876,19.337 20.567,19.337 v1(20.574,19.329)
IIC2_SDA: R11.1 U1.22 U5.16 U7.1 | length 13.6
  Top Layer w0.152: U1.22 17.463,18.844 v1(18.869,20.25) ; R11.1 20.326,20.601 20.593,20.334 U5.16
  POWER w0.254: v1(20.904,26.619) 21.14,26.383 v1(21.14,20.091)
  Bottom Layer w0.152: v1(18.869,20.25) 19.028,20.091 v1(21.14,20.091)
key-2: U1.32 U2.4 | length 25.4
  Top Layer w0.152: v1@8.56,5.232 8.56,4.558 8.642,4.476
  Top Layer w0.203: v1(11.836,19.507) 11.836,19.532 11.917,19.612 U1.32
  Top Layer w0.254: 8.642,4.476 8.642,4.004 11.935,0.711 v1(14.046,0.711)
  POWER w0.203: v1(8.642,5.385) 8.693,5.385 9.837,6.529 9.837,15.975 11.779,17.916 11.779,19.45 v1(11.836,19.507)
  Bottom Layer w0.254: U2.4 v1@14.152,0.929
KEY_1_WKUP: U1.10 U2.3 | length 14.4
  Top Layer w0.152: U1.10 14.417,12.545 v1(14.935,12.026)
  Top Layer w0.203: v1(10.667,5.812) 10.667,6.705 v1(11.532,7.569)
  POWER w0.203: v1(11.532,7.569) 12.976,9.013 13.77,9.013 14.935,10.178 v1(14.935,12.026)
  Bottom Layer w0.203: v1(10.667,5.812) 10.671,5.808 10.671,5.331
  Bottom Layer w0.254: 10.671,5.331 11.684,4.318 12.735,4.318 13.299,3.754 U2.3
LCD_DC: L1.7 U1.45 | length 20.3
  Top Layer w0.152: v1(5.944,13.841) 7.942,15.839 9.211,15.839 U1.45
  Top Layer w0.203: v1(7.544,23.724) v1(9.398,23.724)
  POWER w0.203: v1(5.944,13.841) 5.862,13.841 5.064,14.639 5.064,19.209 7.544,21.688 v1(7.544,23.724)
  Bottom Layer w0.203: v1(9.398,23.724) 10.316,23.724 10.671,23.368 L1.7
LCD_RES: L1.11 U1.46 | length 20.5
  Top Layer w0.152: v1(8.128,15.131) 8.428,15.131 8.662,15.364 9.197,15.364 U1.46
  POWER w0.203: v1(8.128,15.131) 8.128,15.247 7.597,15.777 7.597,17.023 8.729,18.154 8.729,23.805 8.941,24.017 v1(8.941,25.552)
  Bottom Layer w0.203: v1(8.941,25.552) 8.998,25.609 9.4,25.609 9.617,25.826 10.941,25.826 11.527,25.24 13.051,25.24 13.51,24.782 13.51,21.825 L1.11
MPU_INT: R12.1 U1.41 U6.12 | length 12
  Top Layer w0.152: U6.12 v1(1.187,14.923) 1.254,14.856 1.254,14.297 1.326,14.225 1.326,14.125 1.449,14.001 R12.1 ; v1@7.196,17.93 7.223,17.93 7.312,17.841 U1.41@9.229,17.841
  Bottom Layer w0.152: v1(1.187,14.923) 3.517,17.253 4.558,17.253 5.261,16.55 6.317,16.55 7.188,17.421 v1(7.188,17.856)
NetAN1_1: AN1.1 BL1.1 | length 0.8
  Top Layer w0.5: AN1.1 5.511,27.509 6.223,27.509
NetBC6_1: BC6.1 BC7.2 BL3.2 | length 1.7
  Top Layer w0.4: BC7.2 9.929,27.89 BC6.1
NetBC7_1: BC7.1 BL2.2 BL4.1 | length 1.4
  Top Layer w0.4: BL2.2 8.642,27.309 8.803,27.309 9.138,26.974 BL4.1 ; 8.853,27.509 9.155,27.811 BC7.1
NetBC8_1: BC8.1 BL1.2 BL2.1 | length 1.5
  Top Layer w0.4: BL1.2 BL2.1 BC8.1
NetBC9_1: BC9.1 BC10.1 BL4.2 | length 1.7
  Top Layer w0.4: BL4.2 BC9.1 BC10.1
NetC7_1: C7.1 pad.2@1.3,1.466 U2.6 | length 11.1
  Top Layer w0.254: pad.2@1.3,1.466 1.187,1.579 1.81,0.956 10.339,0.956 v1(10.366,0.929)
  Bottom Layer w0.381: C7.1 10.039,0.956 10.066,0.929 U2.6
NetC8_1: C8.1 pad.2@24.693,1.528 U2.5 | length 16.7
  Top Layer w0.254: v1(11.69,2.128) 12.239,1.579 14.342,1.579 15.007,0.914 18.428,0.914 18.984,1.47 pad.2@24.498,1.47
  Bottom Layer w0.381: C8.1 11.72,2.159 12.349,1.53 U2.5
NetC12_1: C12.1 U5.10 | length 1
  Top Layer w0.254: U5.10 22.988,22.362 22.988,23.363 C12.1
NetC13_1: C13.1 U6.20 | length 5.3
  Top Layer w0.152: U6.20 5.753,16.173
  Top Layer w0.203: 5.753,16.173 5.878,16.173 v1(6.274,15.777)
  Bottom Layer w0.152: C13.1 4.582,14.491 5.868,15.777 v1(6.274,15.777)
NetC14_1: C14.1 U5.8 | length 1.2
  Top Layer w0.152: U5.8 24.083,21.834 24.255,21.662 25.08,21.662 C14.1
NetC14_2: C14.2 U5.12 | length 3.8
  Top Layer w0.152: U5.12 21.984,21.922 23.085,20.822 v1(23.293,20.822)
  Bottom Layer w0.152: v1(23.293,20.822) 23.338,20.777 23.36,20.8 v1@24.895,20.8
  other v1: 24.917,20.777
NetC15_2: C15.2 U6.10 | length 3.4
  Top Layer w0.152: C15.2 0.606,14.028 0.483,14.152 0.483,16.584 0.572,16.673 U6.10
NetC19_2: C19.2 U8.6 | length 3.5
  Top Layer w0.203: v1@11.633,5.318 11.849,5.102 11.849,4.636 11.983,4.502 12.718,4.502 U8.6
  Bottom Layer w0.254: v1@11.589,5.529 12.205,4.913 C19.2
  other v1: 11.633,5.385
NetC23_1: C23.1 U10.10 | length 1.1
  Top Layer w0.203: C23.1 22.064,16.481 22.288,16.256 U10.10
NetL2_1: L2.1 U9.4 | length 1.8
  Top Layer w0.254: L2.1 15.891,5.41 U9.4
NetL2_2: L2.2 U9.2 | length 1.8
  Top Layer w0.254: L2.2 15.891,6.411 U9.2
NetP2_1: P2.1 U4.2 | length 10.2
  Top Layer w0.254: U4.2 23.763,30.98 v1(24.025,31.242)
  Bottom Layer w0.254: P2.1 21.305,25.273 24.025,27.994 v1(24.025,31.242)
NetR3_2: R3.2 R4.1 U4.1 | length 2.3
  Top Layer w0.152: R4.1 R3.2 22.612,29.906 22.686,29.98 U4.1
NetR13_2: R13.2 R14.2 U9.10 | length 2.2
  Top Layer w0.203: v1(19.685,7.187) 19.696,7.187 19.972,6.91 U9.10
  Bottom Layer w0.203: R13.2 19.306,7.013 v1@19.582,7.289
  Bottom Layer w0.254: R13.2 19.308,6.911 19.308,5.915 R14.2
NetR15_2: R15.2 USB1.A5 | length 2
  Top Layer w0.152: R15.2@20.855,14.091 v1(20.955,14.091)
  Bottom Layer w0.152: USB1.A5@19.644,14.826 USB1.A5 20.63,14.841 20.902,14.57 20.902,14.144 v1(20.955,14.091)
NetR16_2: R16.2 USB1.B5 | length 2.9
  Top Layer w0.152: R16.2 R16.2@22.072,12.331
  Bottom Layer w0.152: USB1.B5 19.733,11.915 20.447,11.915 21.054,12.522 21.477,12.522 21.658,12.341 v1@22.056,12.341
  other v1: 22.025,12.31
NetR19_1: R19.1 U11.9 | length 3.3
  Top Layer w0.152: v1(22.022,3.785) 23.293,3.785 23.767,4.259 23.767,4.592 U11.9
  Bottom Layer w0.152: R19.1 21.342,4.218 21.775,3.785 v1(22.022,3.785)
NetR21_1: R21.1 U11.2 | length 5.2
  Top Layer w0.152: v1(21.206,7.998) 21.466,7.998 21.683,7.781 21.683,7.522 21.963,7.242 23.627,7.242 23.803,7.066 U11.2
  Bottom Layer w0.152: R21.1@21.342,7.393 R21.1 R21.1@21.339,7.496 ; R21.1@21.339,7.496 21.339,8.125 21.212,7.998 v1(21.206,7.998) 21.272,7.931 21.272,7.563 R21.1@21.339,7.496
NetR22_1: R22.1 U11.7 | length 2.8
  Top Layer w0.152: v1(21.508,5.424) 21.508,5.107 22.417,4.198 23.003,4.198 U11.7
  Bottom Layer w0.152: R22.1 21.432,5.424 v1(21.508,5.424)
NetR23_1: R23.1 U11.4 | length 2.2
  Top Layer w0.152: v1(21.964,6.623) 22.023,6.623 22.339,6.939 22.763,6.939 22.893,6.809 22.893,6.734 23.003,6.623 U11.4
  Bottom Layer w0.152: R23.1 21.729,6.483 21.869,6.623 v1(21.964,6.623)
NetR24_1: R24.1 R25.1 U12.1 | length 2.1
  Bottom Layer w0.254: U12.1 R24.1 R25.1
NetR26_1: R26.1 U12.2 | length 1.3
  Bottom Layer w0.254: R26.1 17.142,3.308 17.247,3.413 U12.2
NRST: R1.1 U1.7 | length 2.6
  Top Layer w0.152: U1.7@12.929,13.641 12.929,13.316 13.183,13.062 v1(13.183,12.649)
  Bottom Layer w0.152: v1(13.183,12.649) 13.183,13.417 13.718,13.952 R1.1
P00: B1.19
P01: B1.18
P04: B1.15
P05: B1.14
P06: B1.13
P07: B1.12
P11: B1.9
P12: B1.8
P13: B1.7
P14: B1.6
P15: B1.5
P16: B1.38
P17: B1.37
P20: B1.36
P23: B1.33 BC11.2 X4.2 | length 2.8
  Top Layer w0.152: B1.33 15.129,24.124 15.58,23.673 16.267,22.986 16.51,22.986 16.784,22.712 X4.2
  other v1: 16.916,22.885
P24: B1.32 BC14.2 X4.1 | length 2.3
  Top Layer w0.152: B1.32 14.629,23.279 14.858,23.051 14.945,23.051 15.284,22.712 X4.1
  other v1: 15.152,22.993
PC14: C1.2 U1.3 X1.2 | length 2.9
  Top Layer w0.152: X1.2 10.502,12.78 10.84,12.78 10.929,12.869 U1.3@10.929,13.641
  other v1: 8.998,11.715
PC15: C2.2 U1.4 X1.1 | length 2.2
  Top Layer w0.152: X1.1 10.86,12.205 11.429,12.774 U1.4@11.429,13.641
  other v1: 11.034,11.915
PH0: C3.1 U1.5 X2.1 | length 3.2
  Top Layer w0.152: U1.5@11.929,13.641 11.929,12.698 11.619,12.387 11.619,11.305 12.127,10.796 X2.1
  other v1: 12.465,10.972
PH1: C4.2 U1.6 X2.3 | length 2.6
  Top Layer w0.152: U1.6@12.429,13.641 12.429,12.661 12.701,12.389 12.701,12.274 12.705,12.27 12.705,12.177 12.985,11.896 X2.3
  other v1: 13.808,11.72
RBLAS: B1.30 BR1.1 | length 1.5
  Top Layer w0.152: BR1.1 B1.30
RESET: B1.20 SH1.3 | length 36.3
  Top Layer w0.152: B1.20 14.129,30.969 v1(14.275,31.115)
  POWER w0.203: v1(14.275,31.115) 14.735,30.655 14.735,27.155 14.275,26.695 14.275,22.714 14.699,22.29 14.699,20.84 15.891,19.648 15.891,13.16 17.389,11.661 17.389,7.72 20.333,4.775 v1(25.146,4.775)
  Bottom Layer w0.152: SH1.3 v1@24.998,4.913
RF_N: B1.26 BC10.2 | length 1.1
  Top Layer w0.3: BC10.2 12.393,26.974 12.551,27.132 B1.26
RF_P: B1.25 BC6.2 | length 1.1
  Top Layer w0.3: BC6.2 12.399,27.79 12.557,27.632 B1.25
RXD: U1.31 U10.8 | length 29.4
  Top Layer w0.152: v1(10.076,25.24) 9.961,25.125 9.961,24.311 10.334,23.938 10.334,22.952 12.417,20.869 U1.31
  Top Layer w0.203: v1(22.908,18.412) 22.908,17.993 23.693,17.208 23.732,17.208 23.955,16.986 23.955,16.304 U10.8
  POWER w0.203: v1(10.076,25.24) 12.015,25.24 v1(12.545,25.771) ; v1@22.908,18.44 24.239,19.771 v1(24.239,23.554)
  Bottom Layer w0.152: v1(10.076,25.24) v1@10.136,25.24
  Bottom Layer w0.203: v1(12.545,25.771) 14.993,25.771 16.941,23.823 23.97,23.823 v1(24.239,23.554)
SPI1_CS_FLASH: U1.14 U3.1 | length 11.6
  Top Layer w0.203: v1(14.935,14.801) 14.97,14.835 16.108,14.835 U1.14
  Bottom Layer w0.152: v1(6.147,12.449) 7.118,12.449 7.951,13.281 10.616,13.281 12.854,15.52 14.216,15.52 v1(14.935,14.801)
SPI1_CS_LCD: L1.8 U1.11 | length 19
  Top Layer w0.203: v1(10.418,15.405) 11.022,14.801 14.085,14.801 14.917,13.969 U1.11 14.917,12.913 15.621,12.209 v1(15.621,12.014)
  POWER w0.203: v1(10.418,15.405) 10.418,15.489 12.776,17.847 12.776,21.092 11.296,22.573 v1(11.296,23.639)
  Bottom Layer w0.152: v1(11.296,23.639) 11.381,23.554 L1.8
SPI1_MISO: R5.1 U1.16 U3.2 | length 16.8
  Top Layer w0.152: v1(4.39,11.571) 4.572,11.571 U3.2 4.521,12.256 5.318,13.053 v1(6.716,13.053) ; v1(15.25,15.839) 15.255,15.844 U1.16
  POWER w0.152: v1(6.716,13.053) 7.811,14.148 v1(8.026,14.148)
  Bottom Layer w0.152: v1(8.026,14.148) 8.043,14.148 9.805,15.91 10.627,15.91 10.698,15.839 v1(15.25,15.839)
  Bottom Layer w0.254: R5.1 2.388,11.571 v1(4.39,11.571)
SPI1_MOSI: L1.10 R6.1 U1.17 U3.5 | length 49.3
  Top Layer w0.152: v1(6.833,6.067) 7.236,6.471 7.236,9.761 7.284,9.809 v1(7.468,9.809) v1(7.468,14.554) ; v1@15.411,16.724 15.792,16.344 U1.17
  Top Layer w0.254: U3.5@2.032,4.476 2.032,4.743 2.769,5.48 v1(2.769,5.864)
  POWER w0.203: v1(11.034,9.752) 11.034,10.505 12.178,11.649 12.958,11.649 14.053,12.743 14.053,16.528 15.312,17.787 15.312,19.424 14.053,20.683 14.053,22.447 v1(12.779,23.721)
  Bottom Layer w0.152: v1(7.468,14.554) 7.468,16.398 8.107,17.038 14.956,17.038 v1(15.203,16.791) ; L1.10 v1(12.779,23.721)
  Bottom Layer w0.203: v1@7.468,9.766 v1@11.034,9.766
  Bottom Layer w0.254: R6.1 1.86,6.383 2.176,6.067 v1(6.833,6.067)
SPI1_SCK: L1.9 R7.1 U1.15 U3.6 | length 56.7
  Top Layer w0.152: v1(10.466,24.52) 11.243,24.52 11.877,23.886 ; U1.15 17.527,15.344 17.784,15.088 v1(18.109,15.088)
  Top Layer w0.203: 11.877,23.886 v1(12.09,23.673)
  Top Layer w0.254: U3.6@3.302,4.476 3.302,5.182 4.089,5.969 5.907,5.969 6.731,6.793 v1(6.731,8.003)
  POWER w0.203: v1(6.274,24.124) 6.274,22.134 3.319,19.178 3.319,14.912 v1(4.39,13.841) 5.015,13.216 5.015,10.63 6.731,8.914 v1(6.731,8.003)
  Bottom Layer w0.152: v1(4.39,13.841) 5.218,13.841 6.601,15.224 6.664,15.224 6.96,15.52 6.96,16.451 7.959,17.45 15.54,17.45 17.903,15.088 v1(18.109,15.088)
  Bottom Layer w0.203: v1(6.274,24.124) 6.67,24.52 v1(10.466,24.52) ; L1.9 v1(12.09,23.673)
  Bottom Layer w0.254: R7.1 v1(6.731,8.003)
SWCLK: SH1.4 U1.37 | length 45.6
  Top Layer w0.152: v1(5.261,21.871) 7.288,19.844 U1.37
  POWER w0.203: v1(4.362,10.363) 3.859,10.866 3.859,13.529 2.769,14.62 2.769,20.684 3.955,21.871 v1(5.261,21.871) ; v1(16.039,10.391) 16.916,9.513 16.916,7.417 20.012,4.322 22.807,4.322 23.065,4.064 v1(25.4,4.064)
  Bottom Layer w0.152: v1(4.362,10.363) 4.39,10.391 5.298,10.391 5.392,10.297 5.601,10.297 5.618,10.314 12.037,10.314 12.137,10.214 15.861,10.214 v1(16.039,10.391) ; SH1.4 v1@25.249,3.913
SWDIO: SH1.5 U1.34 | length 54.9
  Top Layer w0.152: v1(2.937,24.131) 3.435,24.629 9.207,24.629 9.929,23.907 9.929,22.84 10.917,21.852 U1.34
  POWER w0.203: v1(2.937,24.131) 2.007,23.201 2.007,14.685 3.353,13.339 v1(3.353,10.312) ; v1(15.891,9.479) 15.971,9.479 16.203,9.246 16.267,9.246 16.267,5.196 19.304,2.159 v1(22.098,2.159)
  Bottom Layer w0.152: v1(3.353,10.312) 3.353,9.682 3.788,9.246 15.658,9.246 v1(15.891,9.479) ; v1(22.098,2.159) 22.323,2.159 22.529,2.366 24.239,2.366 24.479,2.606 24.479,2.913 SH1.5
SYS_ON: R17.1 U1.26 U8.3 | length 23
  Top Layer w0.152: v1(10.498,7.569) 11.251,8.323 12.878,8.323 13.174,8.027 13.174,7.609 12.878,7.313 12.807,7.313 12.718,7.223 U8.3
  Top Layer w0.203: v1(14.757,19.152) 14.757,20.06 U1.26@14.917,20.219 ; 14.917,19.617 U1.26@14.917,20.219 ; U1.26 U1.26@14.917,20.219
  POWER w0.203: v1(11.495,6.383) 10.498,7.38 v1(10.498,7.569) 10.498,13.568 14.757,17.828 v1(14.757,19.152)
  Bottom Layer w0.152: v1(11.495,6.383) 12.219,6.383 12.465,6.137 12.565,6.137 12.689,6.013 R17.1
SYS_WKUP2: B1.11 U1.2 | length 35.9
  Top Layer w0.152: v1(8.729,12.699) 9.838,12.699 10.429,13.29 U1.2@10.429,13.641 ; B1.11 v1@18.629,31.231
  POWER w0.203: v1(6.414,10.972) 5.392,11.995 5.392,13.589 4.559,14.423 4.559,19.635 6.833,21.909 6.833,23.775 8.087,25.029 8.087,25.589 v1(12.968,30.469)
  Bottom Layer w0.152: v1(6.414,10.972) 7.002,10.972 v1(8.729,12.699)
  Bottom Layer w0.254: v1(12.968,30.469) 16.807,30.469 17.63,31.293 v1(18.567,31.293)
TIM1_CH1: L1.2 U1.29 | length 12.8
  Top Layer w0.152: v1(12.979,24.562) 12.979,24.51 12.968,24.498 13.417,24.049 U1.29
  Bottom Layer w0.152: L1.2 7.039,21.933 7.039,23.933 7.335,24.229 10.043,24.229 10.257,24.015 10.675,24.015 11.222,24.562 v1(12.979,24.562)
TIM2_CH1: R3.1 U1.38 | length 27.3
  Top Layer w0.152: v1(4.572,23.673) 4.572,21.675 6.903,19.344 U1.38
  Top Layer w0.254: v1(20.734,27.89) 20.872,27.89 21.838,28.856 R3.1
  Bottom Layer w0.152: v1(4.572,23.673) 4.572,23.815 6.992,26.235 7.765,26.235 7.864,26.137 9.071,26.137 10.163,27.229 16.535,27.229 17.197,27.89 v1(20.734,27.89)
TXD: U1.30 U10.9 | length 17.7
  Top Layer w0.152: U1.30 12.917,20.219 13.547,19.588 v1(13.547,19.431)
  Top Layer w0.203: v1(22.022,17.993) 22.342,17.673 22.797,17.673 23.503,16.967 U10.9
  Bottom Layer w0.203: v1(13.547,19.431) 14.177,19.431 14.428,19.682 17.547,19.682 19.455,21.59 22.163,21.59 22.762,20.99 22.762,19.902 22.377,19.517 22.377,18.422 22.022,18.067 v1(22.022,17.993)
USART2_RX: B1.16 U1.13 | length 20.5
  Top Layer w0.152: B1.16 v1(16.129,31.304)
  Top Layer w0.203: U1.13 16.12,14.341 17.744,14.341 v1(17.78,14.377)
  POWER w0.203: v1(16.129,31.304) 16.129,26.53 16.039,26.439 16.039,21.807 17.549,20.297 17.549,17.145 17.251,16.847 17.251,14.906 v1(17.78,14.377)
USART2_TX: B1.17 U1.12 | length 22.9
  Top Layer w0.152: v1@15.396,31.242 15.629,31.009 B1.17
  Top Layer w0.203: U1.12 15.417,13.319 16.062,12.674 v1(17.251,12.674)
  POWER w0.203: v1(15.443,31.242) 15.443,24.163 15.734,23.873 15.734,21.346 16.569,20.511 16.569,19.16 16.383,18.973 16.383,14.065 17.219,13.228 17.219,12.705 v1(17.251,12.674)
usb_in_sign: R18.2 R20.1 U1.39 | length 23.9
  Top Layer w0.152: v1@6.497,18.714 v1(6.623,18.841) U1.39@9.229,18.841 ; R18.2 20.855,13.214 20.494,13.214 20.371,13.091 20.371,11.445 20.46,11.356 21.005,11.356 21.389,10.972 21.389,10.921 21.479,10.832 R20.1
  Top Layer w0.203: v1(18.339,16.344) 19.552,15.131 19.552,14.517 R18.2@20.855,13.214
  Bottom Layer w0.152: v1(6.623,18.841) 6.719,18.745 9.398,18.745 10.287,17.856 16.111,17.856 16.8,17.168 17.515,17.168 v1(18.339,16.344)
USB_M/SDA: B1.3
USB_P/SCL: B1.2
VBAT: C20.2 C22.2 P3.1 U9.5 U9.6 U9.7 U9.8 U11.10 U12.3 | length 14.7
  Top Layer w0.254: U9.5 17.592,4.91 17.605,4.897 17.605,4.5 17.914,4.191 19.999,4.191 20.257,3.933 ; 20.257,3.444 20.257,3.398 20.734,2.921 ; U9.7 U9.8 ; C22.2@23.926,3.485 23.926,3.585 24.203,3.862 U11.10
  Top Layer w0.457: v1@20.257,2.956 20.257,3.398 ; 20.257,3.444 20.257,3.933 U9.6 U9.7 ; v1(20.326,2.921) 20.734,2.921 23.362,2.921 C22.2@23.926,3.485
  Bottom Layer w0.254: U12.3 P3.1@20.226,2.913 ; v1(19.177,4.064) 19.18,4.067 19.18,4.907 C20.2
VCC1: B1.4 B1.10 B1.21 B1.24 B1.27 B1.28 B1.29 B1.31 B1.39 BC1.1 BC2.1 BC3.1 BC4.1 BC5.1 BL5.1 | length 38.3
  Top Layer w0.152: v1(11.69,26.01) 12.069,26.01 12.336,26.276 13.231,26.276 B1.28 14.179,26.132 ; B1.29 14.067,25.632 14.179,25.521 ; B1.27 14.179,26.632 ; B1.24 13.38,28.138 v1@14.173,28.138 ; B1.21 B1.21@13.524,29.628 ; BC2.1 13.583,29.687 B1.21@13.524,29.628 ; B1.31 14.129,25.013 14.26,25.144 14.26,25.214 ; 19.327,22.29 18.98,22.637 ; B1.4 20.1,26.632 20.189,26.543 20.189,24.593 21.206,23.576 21.206,22.957 20.886,22.637 18.98,22.637 ; B1.10 14.333,29.632 14.329,29.628 ; B1.21@13.524,29.628 14.329,29.628 ; v1@14.173,28.138 v1(14.179,28.143) 14.179,28.795 14.429,29.045 14.429,29.528 14.329,29.628 ; v1@14.173,28.138 14.154,28.119 14.179,28.095 14.179,26.632 ; 14.179,25.521 14.179,26.132 ; 14.179,25.521 14.179,25.296 14.26,25.214 ; 14.179,26.132 14.179,26.632 ; 14.26,25.214 14.303,25.257 18.04,25.257 18.129,25.168 B1.39 18.129,23.488 18.98,22.637
  Top Layer w0.381: v1(19.36,30.48) 19.371,30.469 B1.10 20.343,29.632 20.446,29.529 20.725,29.529 BC5.1
  Bottom Layer w0.203: v1(11.69,26.01) 11.713,26.01 12.094,26.391 BC4.1
  Bottom Layer w0.381: BC3.1 18.929,29.437 19.36,29.868 v1(19.36,30.48)
VDD-MCU: C5.2 C6.2 C9.2 C17.2 R1.2 R8.2 R10.2 R12.2 R13.1 SH1.6 U1.1 U1.9 U1.24 U1.36 U1.48 U2.1 U6.8 U6.13 U8.1 U8.2 U9.1 | length 97.8
  Top Layer w0.152: U6.13 2.011,14.849 2.011,14.445 2.378,14.078 ; U1.36 9.917,19.993 10.262,19.648 v1(10.262,19.583)
  Top Layer w0.203: R12.2 1.594,13.272 2.569,13.272 v1(2.613,13.316) 2.378,13.551 2.378,14.078 ; v1(8.939,8.414) 8.198,9.155 8.198,12.919 8.882,13.602 9.617,13.602 ; U1.36 9.926,20.535 9.926,20.053 ; U1.9 13.917,12.574 14.405,12.086 14.405,8.078 v1(14.557,7.925)
  Top Layer w0.254: U6.8 0.631,17.673 0.483,17.822 0.483,19.516 v1@1.3,20.334 ; v1@9.229,13.721 U1.48@9.229,14.341 ; 9.617,13.602 9.927,13.602 9.929,13.604 U1.1@9.929,13.641 ; U8.2 U8.1 ; v1@16.129,20.094 16.129,19.841 17.057,19.841 17.207,19.991 C5.2 ; 17.009,7.143 17.009,6.923 17.022,6.91 U9.1
  Top Layer w0.508: U8.1 13.946,7.066 ; 15.135,7.781 16.59,7.781 17.009,7.362 17.009,7.143
  Top Layer w0.762: 13.946,7.066 13.946,7.088 v1@14.681,7.823
  POWER w0.254: 1.37,13.616 1.67,13.316 v1(2.613,13.316)
  POWER w0.381: v1(1.295,20.345) 1.295,18.44 0.568,17.713 0.568,14.418 1.37,13.616 ; v1(10.671,3.357) 12.442,3.357 14.028,1.771 14.344,1.771 15.617,3.044 17.047,3.044
  POWER w0.762: v1(15.443,7.925) 15.443,4.648 17.047,3.044 19.177,0.914 v1(22.174,0.914)
  Bottom Layer w0.152: R1.2 13.737,14.749 13.795,14.749 14.146,14.398 14.146,14.36 14.306,14.2 ; 14.306,14.238 14.306,14.2 ; v1(14.376,11.151) 14.376,14.13 14.306,14.2
  Bottom Layer w0.203: v1(1.295,20.345) 5.359,20.345 6.097,19.607 6.28,19.607 6.298,19.626 10.219,19.626 v1(10.262,19.583) ; v1(2.613,13.316) 2.619,13.31 6.223,13.31 6.53,13.617 8.865,13.617 C6.2@9.256,14.008 ; v1(8.939,8.414) 14.068,8.414 v1(14.557,7.925)
  Bottom Layer w0.254: 1.844,20.298 2.463,19.68 2.563,19.68 2.636,19.607 R8.2 R10.2 ; v1(10.262,19.583) 10.336,19.583 10.817,20.065 15.812,20.065 v1(16.039,20.291) ; R13.1 18.534,6.915 C17.2@18.534,7.955
  Bottom Layer w0.381: C9.2 10.008,3.404 10.054,3.357 v1(10.671,3.357) 11.172,3.357 11.219,3.404 11.314,3.308 11.399,3.393 U2.1 ; v1(15.443,7.925) 15.466,7.948 18.527,7.948 18.534,7.955 18.536,7.957 C17.2 ; v1(22.174,0.914) 22.197,0.937 22.197,1.232 22.878,1.913 SH1.6
  other v1: 9.144,13.792
XOC_1: B1.22 BC13.1 X3.3 | length 2.8
  Top Layer w0.152: X3.3 11.735,30.988 12.551,30.172 12.551,29.549 12.968,29.132 B1.22
  other v1: 11.72,30.886
XOC_2: B1.23 BC12.2 X3.1 | length 3.6
  Top Layer w0.152: X3.1 10.334,29.888 11.09,29.132 11.429,29.132 11.929,28.632 B1.23
  other v1: 10.244,29.97
pads on no net: SH1.0 U1.19 U1.20 U1.25 U1.27 U1.28 U3.9 U5.3 U5.5 U5.6 U5.7 U5.14 U6.2 U6.3 U6.4 U6.5 U6.14 U6.15 U6.16 U6.17 U6.19 U6.21 U6.22 U7.3 U7.4 U10.4 U10.5 U10.6 U11.5 U11.6 U11.8 USB1. USB1.1 USB1.2 USB1.3 USB1.4 USB1.A8 USB1.B8

## Polygon pours and split planes (outlines as drawn)
GND on Top Layer "Top Layer-No Net1" (solid, pour order 12): 0,0 0,32 26,32 26,0
no net on Top Layer "Top Layer-No Net" (solid, pour order 4): 7.245,28.448
no net on Top Layer "Top Layer-No Net 1" (solid, pour order 0): 6.479,27.813
GND on POWER "Top Layer-No Net3" (solid, pour order 14): 0,0 0,32 26,32 26,0
5V on POWER "POWER-5V 1" (solid, pour order 6): 25.781,17.145 22.352,17.145 22.352,6.623 25.781,6.623
5V on POWER "POWER-5V" (solid, pour order 10): 20.568,12.065 20.645,11.988 20.645,11.191 21.342,11.191 22.119,10.414 22.479,10.414 22.479,12.841 20.645,12.841 20.645,11.918 20.568,11.841
GND on GND "Top Layer-No Net2" (solid, pour order 13): 0,0 0,32 26,32 26,0
GND on Bottom Layer "Top Layer-No Net4" (solid, pour order 15): 0,0 0,32 26,32 26,0

## Keep-outs
Keep-Out Layer:
  the board outline again, w0.254

## Other copper
Top Layer:
  rectangle net 3.3V: 13.929,3.732 14.929,4.315
  rectangle net 5V: 24.203,6.411 25.146,6.91
  pour cut-out: 5.775,31.612 5.775,30.997 5.775,25.216 1.254,25.216 1.3,25.263 1.3,28.882 0.388,28.882 0.388,31.612
GND:
  pour cut-out: 5.775,31.612 5.775,30.997 5.775,25.216 1.254,25.216 1.3,25.263 1.3,28.882 0.388,28.882 0.388,31.612
POWER:
  pour cut-out: 5.775,31.612 5.775,30.997 5.775,25.216 1.254,25.216 1.3,25.263 1.3,28.882 0.388,28.882 0.388,31.612
Bottom Layer:
  pour cut-out: 5.775,31.612 5.775,30.997 5.775,25.216 1.254,25.216 1.3,25.263 1.3,28.882 0.388,28.882 0.388,31.612

## Silkscreen, mask and mechanical layers (free items; w line width, h text height)
Top Overlay:
  lines w0.254: -0.086,2.794 26,2.794
Bottom Overlay:
  lines w0.254: 20.402,18.641 25.402,18.641 25.402,31.641 ; 20.402,31.632 25.402,31.632 ; 20.412,18.641 20.412,31.641